# EAGLE board MFD PSU V0_0a (EAGLE 5.06)
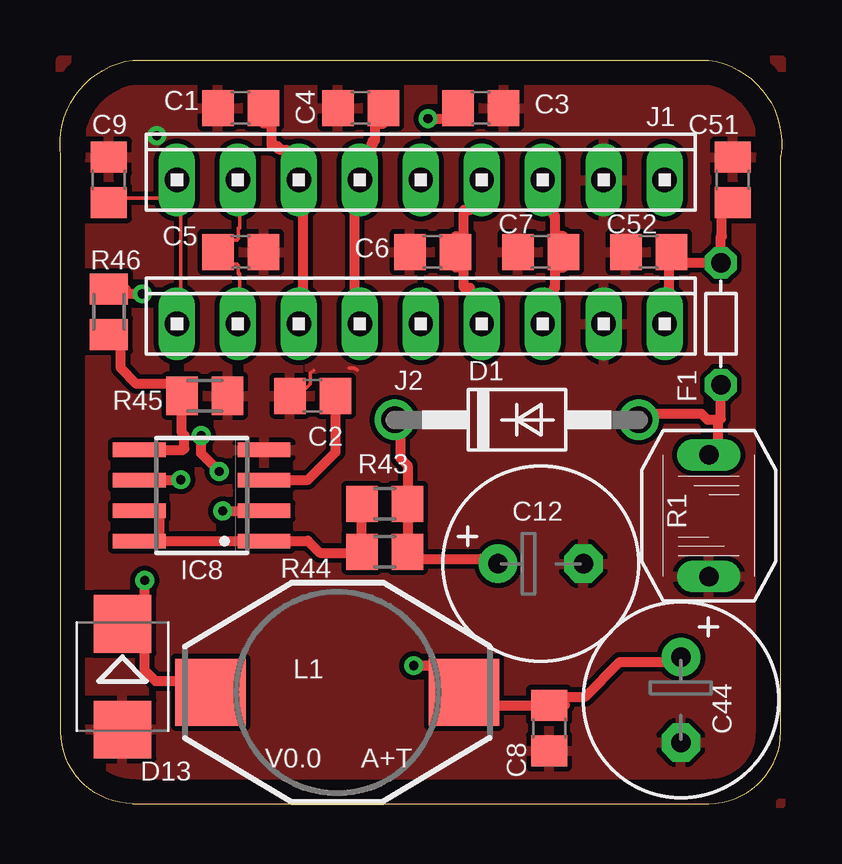
[diagram p0: board, top side]
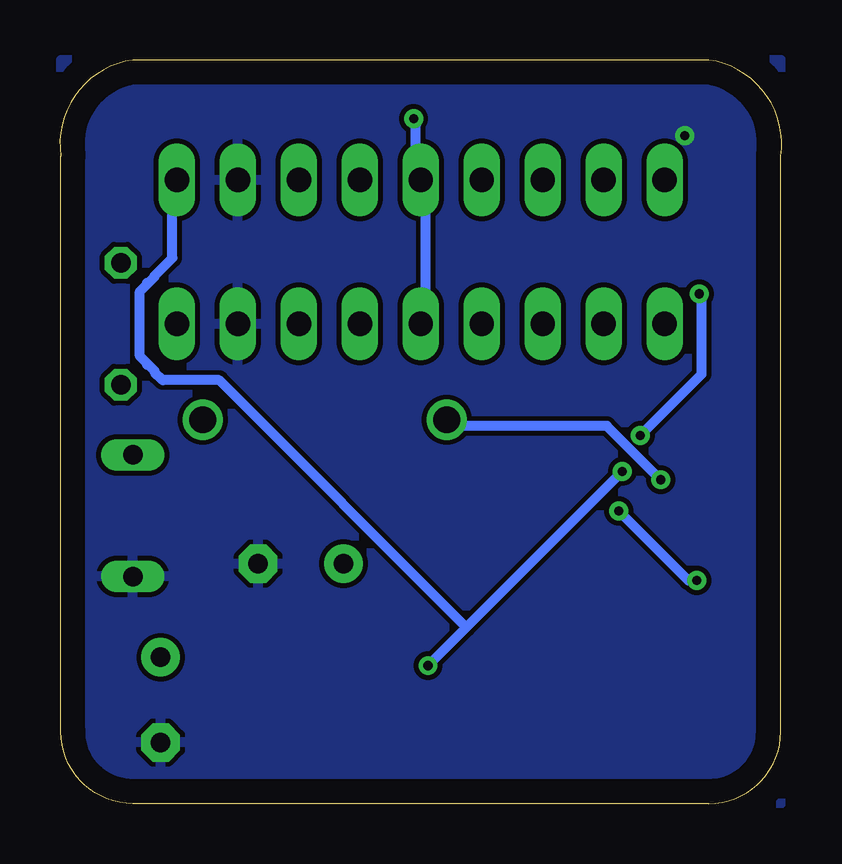
[diagram p1: board, bottom side, seen from below]

Size 30.06 x 31 mm. Coordinates in mm from the lower left corner, seen from the top.
Outline: 3.03,0 27.03,0 arc90 30.03,3 30.03,27 arc90 27.03,31 3.03,31 arc90 0.03,27 0.03,3 arc90 3.03,0
Copper layers (1*16): Top 0.035mm / dielectric 1.5mm / Bottom 0.035mm
Design rules "default *": minimum track width 6mil, minimum drill 15mil, track to track 8mil, track to pad 8mil, pad to pad 8mil, via to via 8mil, smd to smd 8mil, copper to edge 40mil, drill to drill 8mil, minimum pad ring 10mil, minimum via ring 8mil, stop-mask expansion 4mil, vias tented up to drill 0mil, thermal gap 10mil

## Footprints (pad centres in the part's own frame; a part is rotated, then mirrored left to right if it is on the bottom)
C0805 = smd 1.3 x 1.5: 1 -0.95,0; 2 0.95,0
E3,5-8 = drill 0.813 pad 1.6 round: + -1.778,0 | drill 0.813 pad 1.6 octagon: - 1.778,0
DO41-10 = drill 1.118 round: A 5.08,0; C -5.08,0
SMB = smd 2.4 x 2.4: A 2.2,0; C -2.2,0
R-5 = drill 0.813 octagon: 1 -2.54,0; 2 2.54,0
SO08 = smd 0.6 x 2.2: 1 -1.905,-2.6; 2 -0.635,-2.6; 3 0.635,-2.6; 4 1.905,-2.6; 5 1.905,2.6; 6 0.635,2.6; 7 -0.635,2.6; 8 -1.905,2.6
10X09MTA = drill 1.016 long: 1 10.16,0; 2 7.62,0; 3 5.08,0; 4 2.54,0; 5 0,0; 6 -2.54,0; 7 -5.08,0; 8 -7.62,0; 9 -10.16,0
DO3316P = smd 2.92 x 2.79: 1 -5.28,0; 2 5.28,0
P592 = drill 0.813 long: 1 0,2.54; 2 0,-2.54
R0805 = smd 1.3 x 1.5: 1 -0.95,0; 2 0.95,0
M0805 = smd 1.3 x 1.6: 1 -0.95,0; 2 0.95,0

## Placement (x,y rotation side)
C1  1n  [C0805]  7.53,29 180 top
C2  470p  [C0805]  10.53,17 180 top
C3  1n  [C0805]  17.53,29 0 top
C4  1n  [C0805]  12.53,29 180 top
C5  1n  [C0805]  7.53,23 0 top
C6  330p  [C0805]  15.53,23 180 top
C7  330p  [C0805]  20.03,23 180 top
C8  100n  [C0805]  20.38,3.15 270 top
C9  1n  [C0805]  2.03,26 90 top
C12  100u  [E3,5-8]  20.03,10 0 top
C44  470u  [E3,5-8]  25.87,4.32 270 top
C51  100n  [C0805]  28.03,26 90 top
C52  1n  [C0805]  24.53,23 180 top
D1  1N4004  [DO41-10]  19.03,16 0 top
D13  MBRS130LT3  [SMB]  2.6,5.29 270 top
F1  330mA  [R-5]  27.53,20 90 top
IC8  MC34063AD  [SO08]  5.9,12.84 90 top
J1  [10X09MTA]  15.03,26 0 top
J2  [10X09MTA]  15.03,20 0 top
L1  [DO3316P]  11.55,4.64 0 top
R1  27Z1  [P592]  27.03,12 0 top
R43  1.2  [R0805]  13.53,12.5 0 top
R44  1.2  [R0805]  13.53,10.5 0 top
R45  1K2  [M0805]  6.03,17 180 top
R46  3K6  [M0805]  2.03,20.5 270 top

## Library data of the parts
C1-C9 C12 C44 C51 C52 R43-R46 = rcl
D1 D13 = diode
F1 R1 = varistor
IC8 = v-reg-3
J1 J2 = con-amp
L1 = inductor-coilcraft

## Nets
+5V: C8.1 C44.+ J1.1 L1.2 R46.1
+12V: C12.+ D1.C IC8.6 R43.2 R44.2
FUSED: D1.A F1.1 R1.1
GND: C1.2 C2.2 C3.2 C4.2 C5.2 C6.2 C7.2 C8.2 C9.2 C12.- C44.- C51.2 C52.2 D13.A IC8.4 J1.2 J2.2 R1.2 R45.1
N$1: C3.1 J1.5 J2.5
N$2: C6.1 J1.4 J2.4
N$3: C4.1 J1.6 J2.6
N$4: C1.1 J1.7 J2.7
N$5: C5.1 J1.8 J2.8
N$6: C9.1 J1.9 J2.9
N$14: C7.1 J1.3 J2.3
N$79: D13.C IC8.2 L1.1
N$81: IC8.1 IC8.7 IC8.8 R43.1 R44.1
N$83: IC8.5 R45.2 R46.2
N$84: C2.1 IC8.3
SUPPLY: C51.1 C52.1 F1.2 J2.1

## Tracks (layer width: path | path; a pad name or v marks a point on that pad's centre or on a via)
+5V  (via drill 0.38)
  Top 0.406: R46.1 2.73,21.45 2.73,21.25 v3.43,21.25 | v5.88,15.35 5.88,14.6 v6.63,13.85 | v14.73,5.75 15.43,5.75 15.78,5.4 15.78,4.7 15.83,4.65 16.78,4.65 L1.2 17.83,4.65 17.88,4.6 17.88,4.45 18.23,4.1 C8.1 21.03,4.1 21.03,4.45 21.88,4.45 23.33,5.9 25.18,5.9 25.33,6.05 25.83,6.05 C44.+
  Bottom 0.406: v3.43,21.25 3.33,21.15 3.33,17.9 v5.88,15.35 | v14.73,5.75 13.13,7.35 | 13.13,7.35 v6.63,13.85 | J1.1 25.23,26 25.23,24.7 25.38,24.55 25.38,22.75 26.13,22 26.13,21.95 26.38,21.7 26.43,21.7 26.43,21.65 26.73,21.35 26.73,18.65 26.43,18.35 26.43,18.3 26.38,18.3 26.13,18.05 26.13,18 25.78,17.65 23.43,17.65 13.13,7.35
+12V  (via drill 0.38)
  Top 0.406: D1.C 13.98,16 14.18,15.8 14.18,14.4 14.48,14.1 R43.2 R44.2 14.48,10.2 17.53,10.2 17.73,10 C12.+ | v5.03,13.5 3.33,13.5 IC8.6
  Bottom 0.406: v5.03,13.5 7.28,15.75 13.68,15.75 13.93,16 D1.C
FUSED
  Top 0.406: 27.43,15.95 27.43,15.1 27.03,14.7 R1.1 | 27.43,15.95 27.53,16.05 F1.1 | D1.A 24.58,16 24.83,16.25 26.73,16.25 26.98,16 27.38,16 27.43,15.95
GND  (via drill 0.38)
  Top 0.152: 12.05,18.16 12.23,18.15 12.39,18.07 | 10.57,18.06 10.43,17.95 10.43,17.5 9.88,16.95 C2.2
  other vias: 4.03,27.85
  pour Bottom: 0.03,31 30.03,31 30.03,0 0.03,0
  pour Top: 0.03,31 30.03,31 30.03,0 0.03,0
N$1  (via drill 0.38)
  Top 0.406: C3.1 16.58,28.5 16.08,28.5 16.03,28.55 v15.33,28.55
  Bottom 0.406: v15.33,28.55 15.33,28.4 15.23,28.3 15.23,26.2 J1.5 14.83,25.8 14.83,21.45 15.03,21.25 J2.5
N$2
  Top 0.406: J1.4 17.53,26 17.53,25.2 17.08,24.75 16.83,24.75 16.83,23.65 16.48,23.65 C6.1 16.48,22.35 16.83,22.35 16.83,21.5 17.08,21.5 17.08,21.25 17.53,20.8 17.53,20 J2.4
N$3
  Top 0.406: C4.1 13.48,28.35 13.13,28.35 13.13,27.65 13.03,27.65 13.03,27.5 12.98,27.5 12.98,26.45 12.53,26 J1.6 12.48,25.95 12.28,25.75 12.28,21.45 12.48,21.25 J2.6
N$4
  Top 0.406: C1.1 8.48,28.35 8.83,28.35 8.83,27.4 9.08,27.4 9.08,27.3 9.18,27.3 9.18,27.25 9.43,27.25 9.93,26.75 9.93,26 J1.7 9.98,25.95 10.13,25.8 10.13,21.45 9.98,21.3 9.98,20 J2.7
N$5
  Top 0.152: J1.8 7.43,26 7.48,25.95 7.48,24 7.43,24 7.43,23.55 7.38,23.5 6.58,23.5 C5.1 6.58,22.5 7.38,22.5 7.43,22.45 7.43,22.1 7.48,22.1 7.48,21.45 7.43,21.4 7.43,20 J2.8
N$6
  Top 0.152: C9.1 2.68,25.05 2.68,25.25 4.18,25.25 4.83,25.9 4.83,26 J1.9 4.33,25.3 5.03,24.6 5.03,21.45 4.88,21.3 J2.9
N$14
  Top 0.406: J1.3 20.13,26 20.58,25.55 20.58,24.5 20.63,24.5 20.63,23.65 20.98,23.65 C7.1 20.98,22.35 20.63,22.35 20.63,21.5 20.58,21.5 20.58,21.3 20.13,20.85 20.13,20 J2.3
N$20
  pour Top: 0.03,31 30.03,31 30.03,0 0.03,0
N$62
  pour Bottom: 0.03,31 30.03,31 30.03,0 0.03,0
N$79  (via drill 0.38)
  Top 0.406: v6.78,12.2 8.48,12.2 IC8.2 | v3.53,9.3 3.53,7.55 3.48,7.5 2.63,7.5 D13.C 3.53,7.45 3.53,5.55 3.98,5.1 4.88,5.1 5.33,4.65 6.23,4.65 L1.1
  Bottom 0.406: v6.78,12.2 3.88,9.3 v3.53,9.3
N$81
  Top 0.406: IC8.7 3.33,12.2 4.08,12.2 4.13,12.15 4.13,11 4.08,10.95 3.33,10.95 IC8.8 4.18,10.95 8.43,10.95 IC8.1 8.53,10.95 10.33,10.95 10.83,10.45 12.03,10.45 12.48,10 12.58,10 R44.1 R43.1
N$83
  Top 0.406: R46.2 2.53,19.55 2.53,18.15 3.18,17.5 5.08,17.5 R45.2 5.08,15.45 5.18,15.35 5.18,14.8 5.13,14.75 3.33,14.75 IC8.5
N$84
  Top 0.406: C2.1 11.48,14.65 10.33,13.5 8.53,13.5 IC8.3
SUPPLY
  Top 0.406: C51.1 27.53,25.05 27.53,24.55 27.58,24.5 27.58,23.65 27.53,23.65 F1.2 26.03,22.55 25.98,22.5 25.48,22.5 C52.1 25.53,22.45 25.48,22.4 25.43,22.4 25.38,22.35 25.38,21.45 25.23,21.3 25.23,20 J2.1

## Text on the board
tNames: V0.0 | A+T